# Altium PCB panel-8-touch-pad.PcbDoc
Units mm, origin at the board's own origin, x right, y up, seen from the top; angles counter-clockwise.
Board outline 100 x 50 mm, 2 copper layers (Top Layer, Bottom Layer); 84 components, 42 nets, 231 pads, 72 vias.
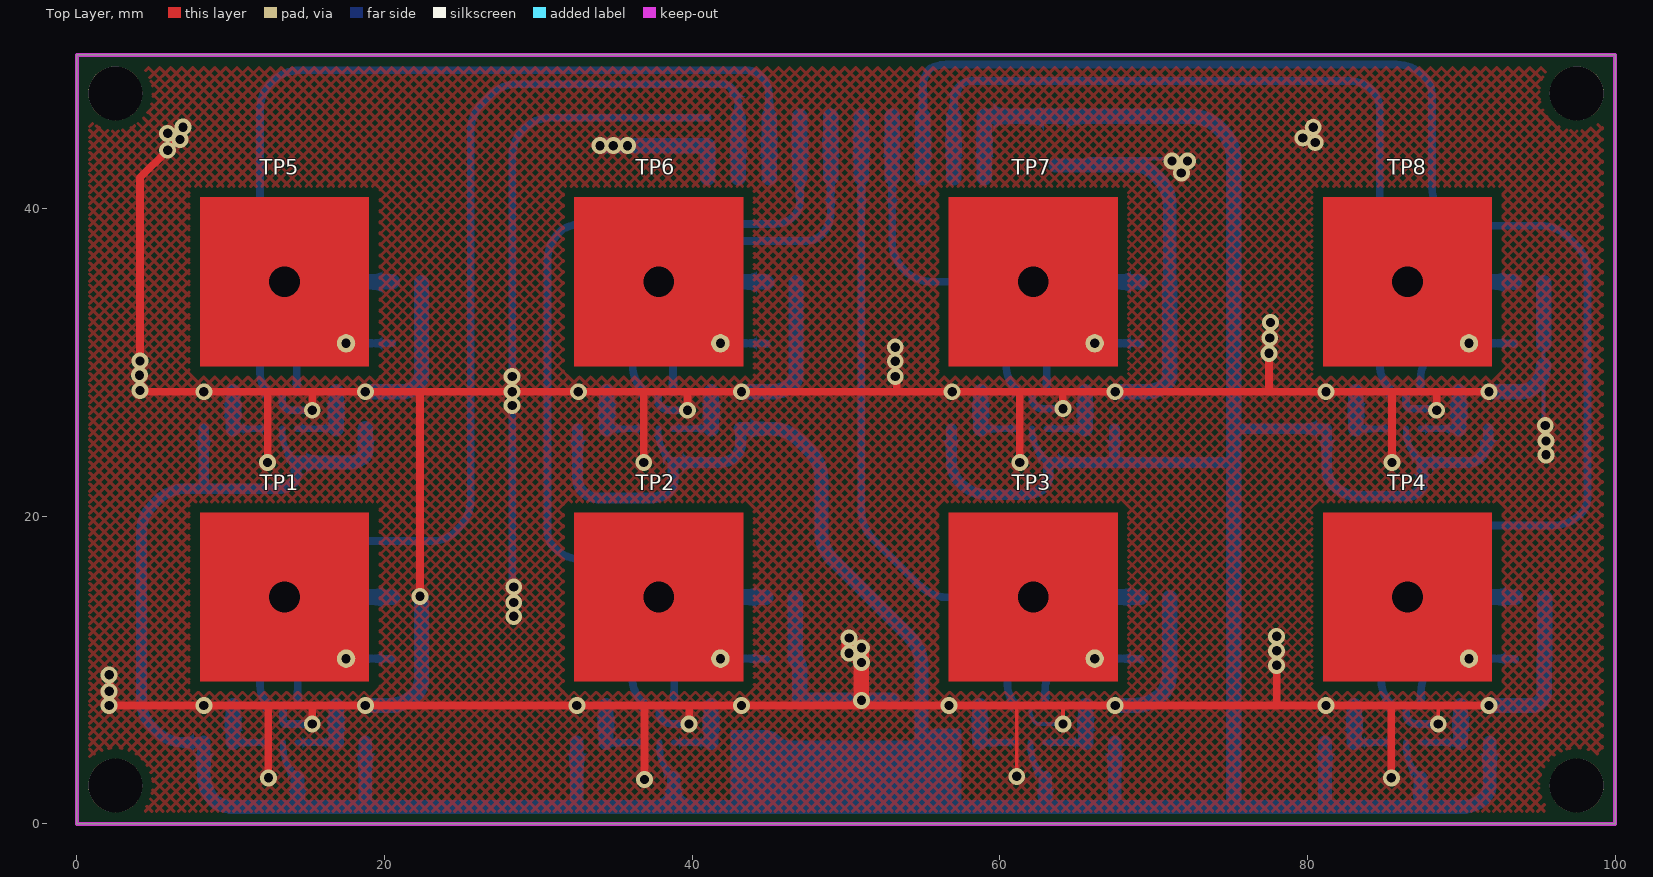
[diagram p0: Top Layer view]
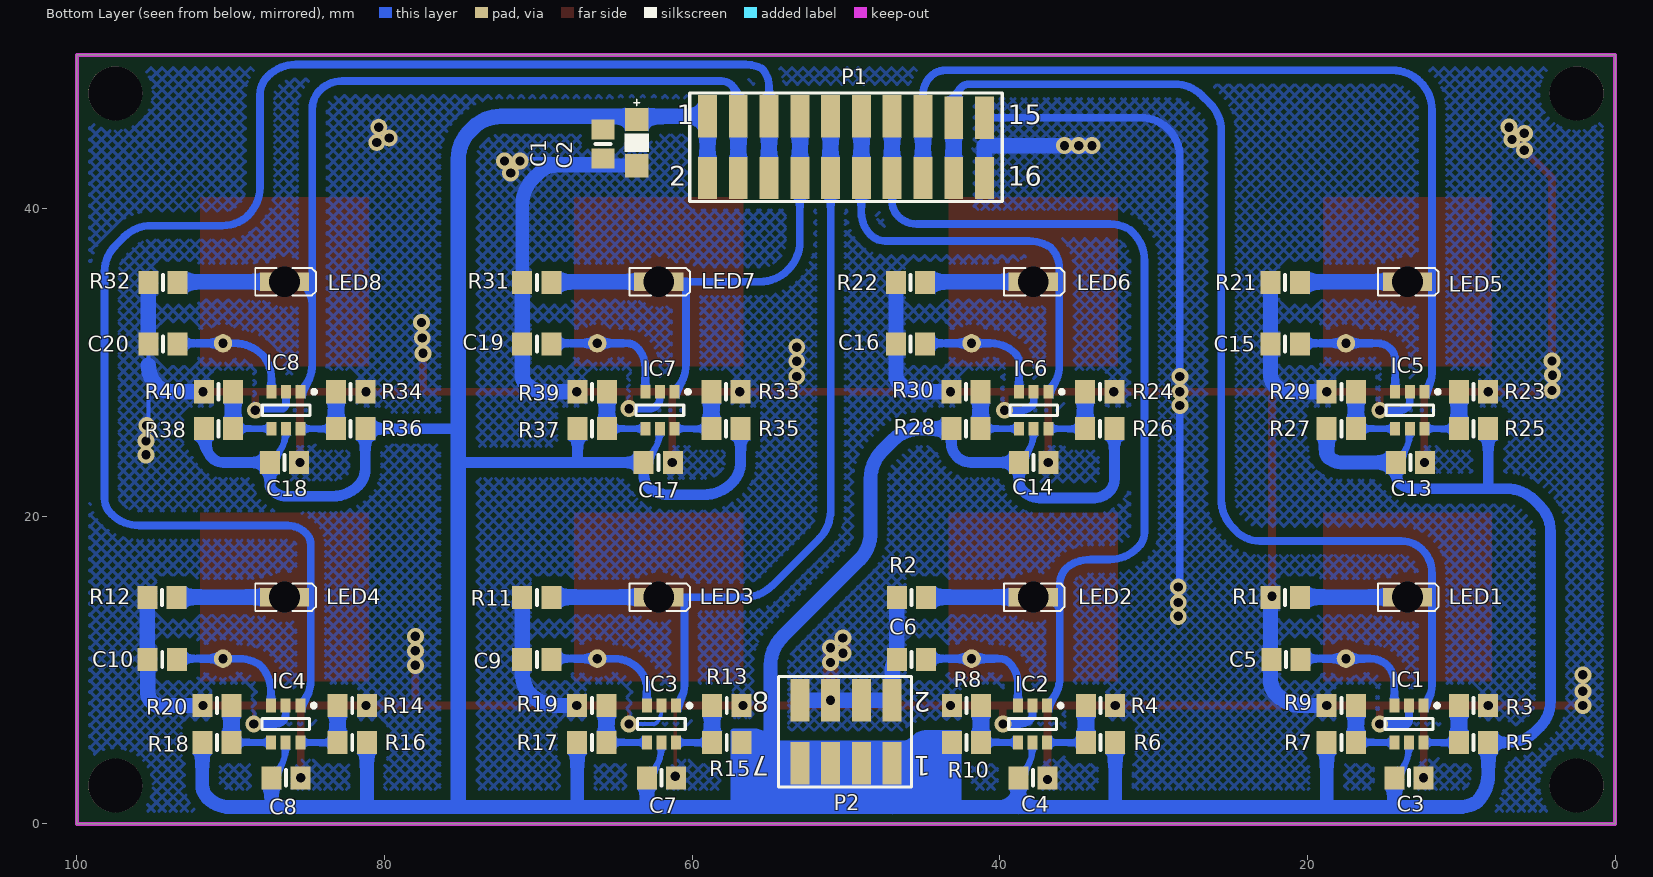
[diagram p1: Bottom Layer view, seen from below]
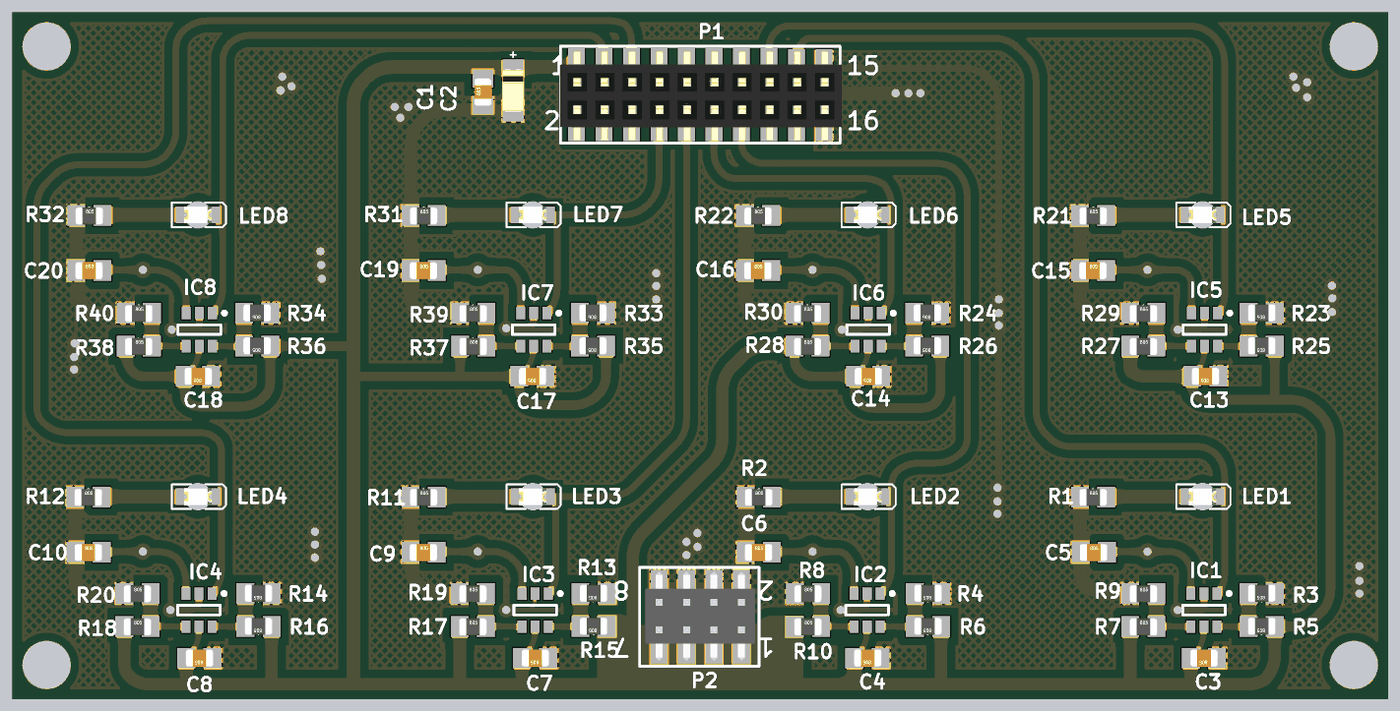
[diagram p2: 3D render of the assembled board from below, using the file's embedded part models]

## Layer stack, top to bottom
Top Solder: solder mask 0.0102, Solder Resist, Dk 3.5
Top Layer: signal copper 0.0356
Dielectric 1: dielectric 0.32, FR-4, Dk 4.8
Bottom Layer: signal copper 0.0356
Bottom Solder: solder mask 0.0102, Solder Resist, Dk 3.5

## Board outline
0,0 100,0 100,50 0,50 0,0

## Design rules (kind name [scope] priority, off if disabled: settings)
Clearance Clearance_1 [InPolygon] p1: gap=0.6
Clearance [All] p2: gap=0.254
PolygonConnect [All] p1: connectstyle=Direct reliefconductorwidth=0.254 reliefentries=4 polygonreliefangle="90 Angle" airgapwidth=0.254
RoomDefinition panel-8-touch-pad [InComponentClass('panel-8-touch-pad')] p1: confinementstyle=ConfineIn formatcopy=TRUE lockcomponents=FALSE outline 141,0 664,0 664,30 141,30
RoutingVias [All] p1: holewidth=0.6 width=1.1 viastyle="Through Hole" minholewidth=0.6 minwidth=1.1 maxholewidth=0.6 maxwidth=1.1
SolderMaskExpansion [All] p1: expansion=0.102
Width [All] p1: maxlimit=1 minlimit=0.254 preferedwidth=0.8
30 further rules are at their usual default settings.

## Components (designator, comment, footprint, x,y, rotation, side; value= is the part's Value field where it differs from the comment)
C1 "100n" C0805 65.8,44.2 r90 bottom
C2 "10uF" C1206 63.6,45.7 r270 bottom
C3 "100n" C0805 13.4,3 r0 bottom
C4 "100n" C0805 37.85,3 r0 bottom
C5 "22pF/50V" C0805 21.4,10.7 r180 bottom
C6 "22pF/50V" C0805 45.75,10.7 r180 bottom
C7 "100n" C0805 62,3 r0 bottom
C8 "100n" C0805 86.4,3 r0 bottom
C9 "22pF/50V" C0805 70.1,10.7 r180 bottom
C10 "22pF/50V" C0805 94.45,10.7 r180 bottom
C13 "100n" C0805 13.3,23.5 r0 bottom
C14 "100n" C0805 37.8,23.5 r0 bottom
C15 "22pF/50V" C0805 21.45,31.2 r180 bottom
C16 "22pF/50V" C0805 45.8,31.2 r180 bottom
C17 "100n" C0805 62.2,23.5 r0 bottom
C18 "100n" C0805 86.5,23.5 r0 bottom
C19 "22pF/50V" C0805 70.1,31.2 r180 bottom
C20 "22pF/50V" C0805 94.4,31.2 r180 bottom
IC1 "TTP223" SOT23-6_L 13.4,6.5 r270 bottom
IC2 "TTP223" SOT23-6_L 37.875,6.5 r270 bottom
IC3 "TTP223" SOT23-6_L 62,6.5 r270 bottom
IC4 "TTP223" SOT23-6_L 86.425,6.5 r270 bottom
IC5 "TTP223" SOT23-6_L 13.35,26.9 r270 bottom
IC6 "TTP223" SOT23-6_L 37.8,26.9 r270 bottom
IC7 "TTP223" SOT23-6_L 62.1,26.9 r270 bottom
IC8 "TTP223" SOT23-6_L 86.4,26.9 r270 bottom
LED1 "Footprint" LED_0805_Blue 13.5,14.75 r180 bottom
LED2 "Footprint" LED_0805_Blue 37.833,14.75 r180 bottom
LED3 "Footprint" LED_0805_Blue 62.167,14.75 r180 bottom
LED4 "Footprint" LED_0805_Blue 86.5,14.75 r180 bottom
LED5 "Footprint" LED_0805_Blue 13.5,35.25 r180 bottom
LED6 "Footprint" LED_0805_Blue 37.833,35.25 r180 bottom
LED7 "Footprint" LED_0805_Blue 62.167,35.25 r180 bottom
LED8 "Footprint" LED_0805_Blue 86.5,35.25 r180 bottom
P1 "Header 10X2" "HDR2X10 - SMD - 2mm" 50,44 r180 bottom
P2 "Header 4X2" "HDR2X4 - SMD - 2mm" 50,6 r0 bottom locked
R1 "220" R0805 21.45,14.725 r180 bottom
R2 "220" R0805 45.75,14.725 r180 bottom
R3 "0R" R0805 9.2,7.7 r0 bottom
R4 "0R" R0805 33.45,7.7 r0 bottom
R5 "0R" R0805 9.2,5.3 r0 bottom
R6 "0R" R0805 33.45,5.3 r0 bottom
R7 "0R" R0805 17.8,5.3 r180 bottom
R8 "0R" R0805 42.175,5.3 r180 bottom
R9 "0R" R0805 17.8,7.7 r180 bottom
R10 "0R" R0805 42.175,7.7 r180 bottom
R11 "220" R0805 70.1,14.725 r180 bottom
R12 "220" R0805 94.475,14.725 r180 bottom
R13 "0R" R0805 57.75,7.7 r0 bottom
R14 "0R" R0805 82.1,7.7 r0 bottom
R15 "0R" R0805 57.75,5.3 r0 bottom
R16 "0R" R0805 82.1,5.3 r0 bottom
R17 "0R" R0805 66.525,5.3 r180 bottom
R18 "0R" R0805 90.9,5.3 r180 bottom
R19 "0R" R0805 66.525,7.7 r180 bottom
R20 "0R" R0805 90.9,7.7 r180 bottom
R21 "220" R0805 21.45,35.2 r180 bottom
R22 "220" R0805 45.8,35.2 r180 bottom
R23 "0R" R0805 9.2,28.1 r0 bottom
R24 "0R" R0805 33.5,28.1 r0 bottom
R25 "0R" R0805 9.2,25.7 r0 bottom
R26 "0R" R0805 33.5,25.7 r0 bottom
R27 "0R" R0805 17.8,25.7 r180 bottom
R28 "0R" R0805 42.2,25.7 r180 bottom
R29 "0R" R0805 17.8,28.1 r180 bottom
R30 "0R" R0805 42.2,28.1 r180 bottom
R31 "220" R0805 70.1,35.2 r180 bottom
R32 "220" R0805 94.4,35.2 r180 bottom
R33 "0R" R0805 57.8,28.1 r0 bottom
R34 "0R" R0805 82.2,28.1 r0 bottom
R35 "0R" R0805 57.8,25.7 r0 bottom
R36 "0R" R0805 82.2,25.7 r0 bottom
R37 "0R" R0805 66.5,25.7 r180 bottom
R38 "0R" R0805 90.8,25.7 r180 bottom
R39 "0R" R0805 66.5,28.1 r180 bottom
R40 "0R" R0805 90.8,28.1 r180 bottom
TP1 "TP" Touch-Pad-Rec 13.5,14.75 r270 top
TP2 "TP" Touch-Pad-Rec 37.833,14.75 r270 top
TP3 "TP" Touch-Pad-Rec 62.167,14.75 r270 top
TP4 "TP" Touch-Pad-Rec 86.5,14.75 r270 top
TP5 "TP" Touch-Pad-Rec 13.5,35.25 r270 top
TP6 "TP" Touch-Pad-Rec 37.833,35.25 r270 top
TP7 "TP" Touch-Pad-Rec 62.167,35.25 r270 top
TP8 "TP" Touch-Pad-Rec 86.5,35.25 r270 top

## Footprints (in the part's own frame and the unit in brackets; to place one, negate y for a bottom-side part, rotate by r counter-clockwise, add the part's x,y. Pads: shape width x height; smd on the part's side, far side on the other; paste and mask are expansions set on the pad)
C0805 [mm] "Chip Capacitor; Body 2.0 x 1.2 mm (LxW typ)"
  rect 1.3x1.5 smd: 1(0.95,0) 2(-0.95,0)
  silkscreen extent 0,-0.5 0,0.5, body extent -1.02,-0.64 0.98,0.61, height 0.78
C1206 [mil]
  rect 60x60 smd: 1(-3.93,0) 2(114.18,0)
  silkscreen extent -55,-31 79,31, body extent -8,-31 118,31, height 63
"HDR2X4 - SMD - 2mm" [mm] "Connector; Header; 8x2 Position"
  rect 1.224x2.754 smd: 1(-3,2.04) 2(-3,-2.04) 3(-1,2.04) 4(-1,-2.04) 5(1,2.04) 6(1,-2.04) 7(3,2.04) 8(3,-2.04)
  silkscreen extent -4.27,-3.6 4.4,3.6, body extent -4,-3.3 4,3.2, height 7
"HDR2X10 - SMD - 2mm" [mm] "Connector; Header; 8x2 Position"
  rect 1.224x2.754 smd: 1(-9,2) 2(-9,-2) 3(-7,2) 4(-7,-2) 5(-5,2) 6(-5,-2) 7(-3,2) 8(-3,-2) 9(-1,2) 10(-1,-2) 11(1,2) 12(1,-2) 13(3,2) 14(3,-2) 15(5,2) 16(5,-2) 17(7,1.92) 18(7,-2) 19(9,1.92) 20(9,-2)
  silkscreen extent -10.16,-3.52 10.16,3.52, body extent -10.2,-3.35 10.3,3.15, height 5.2
LED_0805_Blue [mm] "Chip LED, 2-Leads, Body 2.0x1.3mm, IPC Medium Density"
  rect 1.1x1.2 smd: 1(-1.05,0) 2(1.05,0)
  silkscreen extent -1.91,-0.89 2.03,0.89, body extent -1,-0.63 1,0.62, height 0.68
R0805 [mm]
  rect 1.3x1.5 smd: 1(0.95,0) 2(-0.95,0)
  silkscreen extent 0,-0.5 0,0.5, body extent -1,-0.65 1,0.6, height 0.78
SOT23-6_L [mm] "SOT23, 6-Leads, Body 2.9x1.6mm, Pitch 0.95mm, Lead Span 2.7mm, IPC High Density"
  rect 0.9x0.65 smd: 1(-1.2,0.95) 2(-1.2,0) 3(-1.2,-0.95) 4(1.2,-0.95) 5(1.2,0) 6(1.2,0.95)
  silkscreen extent -1.32,-1.55 0.35,1.95, body extent -0.9,-1.55 0.9,1.55, height 1.45
Touch-Pad-Rec [mm] "Touch-Pad-Rec"
  round 1.2 hole 0.6: 1(4,4)
  round 0 hole 2 unplated: HOLE(0,0)
  Top Layer region: -5.5,-5.5 5.5,-5.5 5.5,5.5 -5.5,5.5
  Top Layer pour cut-out: -6,6 6,6 6,-6 -6,-6

## Part data
C1 C2 C3 C4 C5 C6 C7 C8 C9 C10 C13 C14 C15 C16 C17 C18 C19 C20: library part "Cap Semi", "Capacitor 100n 16V 0603"
IC1 IC2 IC3 IC4 IC5 IC6 IC7 IC8: "TTP223 Touch"
LED1 LED2 LED3 LED4 LED5 LED6 LED7 LED8: library part Led, "LED"
P1: "Header, 10-Pin, Dual row"
P2: "Header, 4-Pin, Dual row"
R1 R2 R11 R12 R21 R22 R31 R32: library part RM, "Resistor SMD"
R3 R4 R5 R6 R7 R8 R9 R10 R13 R14 R15 R16 R17 R18 R19 R20 R23 R24 R25 R26 R27 R28 R29 R30 R33 R34 R35 R36 R37 R38 R39 R40: library part Res3, "Resistor 10k 0603"
TP1 TP2 TP3 TP4 TP5 TP6 TP7 TP8: library part Touch-Pad, "Touch Pad"

## Free pads (board coordinates)
  round 3.5 hole 3.5: 0(2.5,2.5) 0(2.5,47.5) 0(97.5,2.5) 0(97.5,47.5)
  round 1.1 hole 0.6: 2(80.371,45.3) 3(80.5,44.3) 4(79.7,44.6)

## Via types
v1: diameter 1.1, hole 0.6, Top Layer to Bottom Layer, tented both sides, 72 vias

## Nets (pads, with @x,y where several pads share a name; then routed paths per layer and width w, separated by ;. In a path a pad name is that pad's centre, name@x,y a point inside that pad or via, vN(x,y) a via of type N, cw(c..) or ccw(c..) an arc to the next point about the centre after c; other vN are vias at no path point)
3V3: C1.1 C2.1 C3.1 C4.1 C7.1 C8.1 C13.1 C14.1 C17.1 C18.1 IC1.5 IC2.5 IC3.5 IC4.5 IC5.5 IC6.5 IC7.5 IC8.5 P1.1 P1.2 P2.1 P2.3 P2.5 P2.7 R5.2 R6.2 R7.2 R8.2 R15.2 R16.2 R17.2 R18.2 R25.2 R26.2 R27.2 R28.2 R35.2 R36.2 R37.2 R38.2 | length 352.4
  Bottom Layer w0.4: IC5.5 13.35,25.452 ccw(c15.89,25.452) 14.094,23.656 C13.1 ; IC1.5 13.4,5.002 ccw(c15.94,5.002) 14.144,3.206 C3.1 ; IC6.5 37.8,25.502 ccw(c40.34,25.502) 38.544,23.706 C14.1 ; IC2.5 37.875,4.977 ccw(c40.415,4.977) 38.619,3.181 C4.1 ; IC3.5 62,5.002 ccw(c64.54,5.002) 62.744,3.206 C7.1 ; IC7.5 62.1,25.602 ccw(c64.64,25.602) 62.844,23.806 C17.1 ; IC8.5 86.4,25.602 ccw(c88.94,25.602) 87.144,23.806 C18.1 ; IC4.5 86.425,4.977 ccw(c88.965,4.977) 87.169,3.181 C8.1
  Bottom Layer w0.7: R5.2 6.952,5.3 cw(c6.952,7.84) 5.156,6.044 4.9,6.3 cw(c6.59,7.99) 4.2,7.99 4.2,19.01 cw(c6.59,19.01) 4.9,20.7 5.256,21.056 cw(c7.052,19.26) 7.052,21.8 8.2,21.8 ; R25.2 8.25,21.921 cw(c8.079,21.921) 8.2,21.8 ; C13.1 14.25,22.803 cw(c13.011,22.803) 14.115,22.241 cw(c13.05,23.307) 13.05,21.8 8.2,21.8 ; R26.2 32.55,22.445 ccw(c33.745,22.445) 32.9,21.6 ccw(c33.866,22.566) 33.866,21.2 37.415,21.2 ccw(c37.415,22.723) 38.491,21.646 ccw(c37.867,22.271) 38.75,22.271 C14.1 41.87,23.5 ccw(c41.87,24.788) 42.781,23.877 ccw(c41.889,24.769) 43.15,24.769 R28.2 ; R35.2 56.85,23.528 ccw(c58.728,23.528) 57.4,22.2 57.456,22.144 ccw(c59.252,23.94) 59.252,21.4 61.484,21.4 ccw(c61.484,23.685) 62.771,21.796 ccw(c61.854,22.713) 63.15,22.713 C17.1 67.5,23.5 ; R37.2 67.45,23.621 ccw(c67.621,23.621) 67.5,23.5 ; 75.2,23.4 ccw(c74.959,23.159) 74.959,23.5 67.5,23.5 ; 75.2,25.8 ccw(c75.441,26.041) 75.441,25.7 R36.2 81.25,23.086 ccw(c82.786,23.086) 81.7,22 ccw(c83.39,23.69) 83.39,21.3 86.334,21.3 ccw(c86.334,22.666) 87.3,21.7 ccw(c86.938,22.062) 87.45,22.062 C18.1 90.476,23.5 ccw(c90.476,24.524) 91.2,23.8 ccw(c89.872,25.128) 91.75,25.128 R38.2
  Bottom Layer w0.9: R5.2 8.25,3.223 ccw(c10.79,3.223) 8.994,1.427 9.007,1.413 ccw(c10.19,3.49) 10.19,1.1 14.4,1.1 ; C13.1 17.804,23.5 ccw(c17.804,24.626) 18.6,23.83 ; C3.1 14.35,1.221 ccw(c14.521,1.221) 14.4,1.1 ; R7.2 18.75,1.221 ccw(c18.921,1.221) 18.8,1.1 ; R6.2 32.5,1.341 cw(c32.159,1.341) 32.4,1.1 ; C4.1 38.8,1.1 ; R8.2 43.125,1.281 ccw(c43.381,1.281) 43.2,1.1 ; R28.2 45.148,25.7 cw(c45.148,23.16) 46.944,24.956 47.656,24.244 cw(c45.86,22.448) 48.4,22.448 48.4,18.952 ccw(c50.94,18.952) 49.144,17.156 54.156,12.144 cw(c52.36,10.348) 54.9,10.348 54.9,5.266 cw(c53.534,5.266) 54.5,4.3 cw(c53.679,5.121) 53.679,3.96 P2.7 ; P2.1 47,1.1 ; R15.2 56.8,1.341 ccw(c57.141,1.341) 56.9,1.1 ; C7.1 62.95,1.221 ccw(c63.121,1.221) 63,1.1 ; R17.2 67.475,1.281 cw(c67.219,1.281) 67.4,1.1 ; 75.2,1.341 ccw(c75.541,1.341) 75.3,1.1 ; R16.2 81.15,1.221 ccw(c81.321,1.221) 81.2,1.1 ; C8.1 87.35,1.221 cw(c87.179,1.221) 87.3,1.1 ; R18.2 91.85,2.545 cw(c90.655,2.545) 91.5,1.7 cw(c90.051,3.149) 90.051,1.1 87.3,1.1 ; 14.4,1.1 18.8,1.1 ; 18.8,1.1 32.4,1.1 ; 32.4,1.1 38.8,1.1 ; 38.8,1.1 43.2,1.1 ; 43.2,1.1 47,1.1 ; 47,1.1 56.9,1.1 ; 56.9,1.1 63,1.1 ; 63,1.1 67.4,1.1 ; 67.4,1.1 75.3,1.1 ; 75.3,1.1 81.2,1.1 ; 81.2,1.1 87.3,1.1
  Bottom Layer w1: 18.6,23.83 ccw(c18.238,24.192) 18.75,24.192 R27.2 ; P2.1 P2.3 P2.5 P2.7 ; P1.2 P1.1 72.448,46 cw(c72.448,43.46) 74.244,45.256 74.456,45.044 cw(c72.66,43.248) 75.2,43.248 75.2,25.8 75.2,23.4 75.2,1.341
GND: C1.2 C2.2 C3.2 C4.2 C5.2 C6.2 C7.2 C8.2 C9.2 C10.2 C13.2 C14.2 C15.2 C16.2 C17.2 C18.2 C19.2 C20.2 IC1.2 IC2.2 IC3.2 IC4.2 IC5.2 IC6.2 IC7.2 IC8.2 P1.19 P1.20 P2.2 P2.4 P2.6 P2.8 pad.2 pad.3 pad.4 R1.2 R2.2 R3.2 R4.2 R9.2 R10.2 R11.2 R12.2 R13.2 R14.2 R19.2 R20.2 R21.2 R22.2 R23.2 R24.2 R29.2 R30.2 R31.2 R32.2 R33.2 R34.2 R39.2 R40.2 | length 462.5
  Top Layer w0.254: v1(61.1,3.1) 61.1,7.7 ; 64,7.7 cw(c63.759,7.459) 64.1,7.459 v1(64.1,6.5) ; v1(88.5,6.5) 88.5,7.7
  Top Layer w0.5: v1(2.1,9.7) v1(2.1,8.624) v1(2.1,7.7) v1(8.25,7.7) 12.4,7.7 ; v1(5.9,44.9) 6.5,44.9 v1@6.7,45.1 ; v1(6.9,45.3) v1@6.7,45.1 ; v1(12.4,23.5) 12.4,28.1 ; v1(12.45,3) 12.45,7.579 ccw(c12.279,7.579) 12.4,7.7 ; v1(15.3,6.5) 15.3,7.459 ccw(c14.959,7.459) 15.2,7.7 ; v1(15.3,26.9) 15.3,28.1 ; v1(22.3,14.8) 22.3,27.859 ccw(c21.959,27.859) 22.2,28.1 ; v1(36.85,23.5) 36.85,27.979 ccw(c36.679,27.979) 36.8,28.1 ; v1(36.9,2.9) 36.9,7.7 ; v1(39.7,26.9) 39.7,27.859 cw(c40.041,27.859) 39.8,28.1 ; v1(39.8,6.5) 39.8,7.7 ; v1(53.2,31) v1(53.2,30.084) v1(53.2,29.1) 53.3,29 53.3,28.1 ; v1(61.3,23.5) 61.3,27.859 cw(c61.641,27.859) 61.4,28.1 ; v1(64.1,27) 64.1,28.1 ; v1(77.6,32.6) 77.547,32.547 v1(77.547,31.6) 77.5,31.553 v1(77.5,30.6) 77.5,28.1 ; v1(78,12.2) 78,11.358 78.1,11.258 78,11.158 v1(78,10.313) 78,7.7 ; v1(85.45,3) 85.45,7.579 ccw(c85.279,7.579) 85.4,7.7 ; v1(85.5,23.5) 85.5,27.859 ccw(c85.159,27.859) 85.4,28.1 ; v1(88.4,26.9) 88.4,28.1 ; v1(91.8,7.7) 88.5,7.7 85.4,7.7 ; v1(91.8,28.1) 88.4,28.1 ; v1@6.7,45.1 v1(6.7,44.5) 6.6,44.5 v1(5.9,43.8) 4.1,42 v1(4.1,30.1) 4.064,30.064 v1(4.064,29.179) 4.1,29.143 v1(4.1,28.176) 4.1,28 4.2,28.1 v1(8.25,28.1) 12.4,28.1 ; 12.4,7.7 15.2,7.7 ; 12.4,28.1 15.3,28.1 ; 15.2,7.7 v1(18.75,7.7) v1(32.5,7.7) 36.9,7.7 ; 15.3,28.1 v1(18.75,28.1) 22.2,28.1 ; 22.2,28.1 v1(28.3,28.1) v1(32.6,28.1) 36.8,28.1 ; 36.8,28.1 39.8,28.1 ; 36.9,7.7 39.8,7.7 ; 39.8,7.7 v1(43.2,7.7) v1(56.7,7.7) 61.1,7.7 64,7.7 v1(67.5,7.7) 78,7.7 ; 39.8,28.1 v1(43.2,28.1) 53.3,28.1 ; 53.3,28.1 v1(56.9,28.1) 61.4,28.1 ; 61.4,28.1 64.1,28.1 ; 64.1,28.1 v1(67.5,28.1) 77.5,28.1 ; 77.5,28.1 v1(81.2,28.1) 85.4,28.1 ; 78,7.7 v1(81.2,7.7) 85.4,7.7 ; 85.4,28.1 88.4,28.1
  Top Layer w1: v1(50.205,12.1) 50.2,12.095 v1(50.2,11.1) 50.558,11.458 v1(51,11.458) v1(51,10.5) v1(51,8.04)
  Bottom Layer w0.254: IC3.2 62,7.324 ccw(c63.024,7.324) 62.3,6.6 ccw(c62.541,6.841) 62.541,6.5 v1(64.1,6.5) ; C1.2 71.05,43.25 v1(71.2,43.1) v1(72.2,43.1) 72.2,42.716 v1(71.8,42.316) ; v1@88.3,6.5 v1(88.5,6.5) ; C20.2 95.35,29.828 95.35,26.01 v1(95.46,25.9) 95.46,24.94 v1(95.5,24.9) v1(95.5,24)
  Bottom Layer w0.5: IC5.2 13.35,27.462 ccw(c13.862,27.462) 13.5,27.1 ccw(c13.983,27.583) 13.983,26.9 v1(15.3,26.9) ; IC1.2 13.4,6.741 ccw(c13.741,6.741) 13.5,6.5 v1(15.3,6.5) ; v1(28.3,28.1) v1(28.3,27.2) 28.3,15.641 ccw(c28.641,15.641) v1(28.4,15.4) v1(28.4,14.4) v1(28.4,13.5) ; v1(28.3,29.1) 28.3,43.38 cw(c30.84,43.38) 28.418,44.146 cw(c30.84,43.38) 30.84,45.92 P1.19 ; IC6.2 37.8,27.441 ccw(c38.141,27.441) 37.9,27.2 ccw(c38.624,27.924) 38.624,26.9 39.459,26.9 ccw(c39.459,27.241) 39.7,27 v1(39.7,26.9) ; IC2.2 37.875,7.102 ccw(c38.302,7.102) 38,6.8 ccw(c38.724,7.524) 38.724,6.5 v1(39.8,6.5) ; IC7.2 62.1,27.683 ccw(c62.783,27.683) 62.3,27.2 ccw(c62.783,27.683) 62.783,27 v1(64.1,27) ; IC8.2 86.4,27.341 ccw(c86.741,27.341) 86.5,27.1 ccw(c86.741,27.341) 86.741,27 88.4,27 v1(88.4,26.9) ; IC4.2 86.425,7.122 ccw(c87.022,7.122) 86.6,6.7 ccw(c87.083,7.183) 87.083,6.5 v1@88.3,6.5
  Bottom Layer w0.9: C2.2 68.793,42.8 cw(c68.793,41.093) 70,42.3 70.306,41.994 cw(c68.51,40.198) 71.05,40.198 R31.2
  Bottom Layer w1: v1(18.75,7.7) 20.31,7.7 ccw(c20.31,10.09) 22,8.4 ccw(c21.034,9.366) 22.4,9.366 R1.2 cw(c22.4,14.785) 22.357,14.743 v1(22.3,14.8) ; v1(18.75,28.1) 21.134,28.1 ccw(c21.134,29.466) 22.1,28.5 ccw(c21.376,29.224) 22.4,29.224 C15.2 R21.2 ; v1(34,44.1) v1(34.874,44.1) v1(35.8,44.1) 41,44.1 P1.20 ; v1(43.2,28.1) 45.201,28.1 ccw(c45.201,30.039) 46.572,28.668 ccw(c46.141,29.099) 46.75,29.099 C16.2 R22.2 ; R2.2 C6.2 cw(c45.976,9.976) 47,9.976 P2.2 P2.4 v1(51,8.04) P2.8 ; v1(67.5,7.7) 68.737,7.7 ccw(c68.737,10.24) 70.533,8.444 70.693,8.604 ccw(c68.51,9.902) 71.05,9.902 C9.2 R11.2 ; v1(67.5,28.1) 69.593,28.1 ccw(c69.593,29.807) 70.8,28.6 ccw(c70.196,29.204) 71.05,29.204 C19.2 R31.2 ; v1(91.8,28.1) 93.834,28.1 ccw(c93.834,29.466) 94.8,28.5 ccw(c93.472,29.828) 95.35,29.828 ; R20.2 94.617,7.7 ccw(c94.617,8.383) 95.1,7.9 ccw(c94.376,8.624) 95.4,8.624 C10.2 ; C20.2 R32.2 ; C10.2@95.425,10.7 R12.2
  other v1: 78,11.258
NetC5_1: C5.1 IC1.3 TP1.1 | length 8.5
  Bottom Layer w0.5: IC1.3 14.35,9.214 cw(c15.886,9.214) 14.8,10.3 cw(c15.886,9.214) 15.886,10.75 TP1.1 20.329,10.75 cw(c20.329,10.579) C5.1
NetC6_1: C6.1 IC2.3 TP2.1 | length 8.4
  Bottom Layer w0.5: IC2.3 38.825,9.112 cw(c40.788,9.112) 39.4,10.5 cw(c40.004,9.896) 40.004,10.75 TP2.1 44.679,10.75 cw(c44.679,10.579) C6.1
NetC9_1: C9.1 IC3.3 TP3.1 | length 8.4
  Bottom Layer w0.5: IC3.3 62.95,8.772 cw(c64.828,8.772) 63.5,10.1 cw(c65.069,8.531) 65.069,10.75 TP3.1 69.029,10.75 cw(c69.029,10.579) C9.1
NetC10_1: C10.1 IC4.3 TP4.1 | length 8.3
  Bottom Layer w0.5: IC4.3 87.375,8.562 cw(c89.915,8.562) 88.119,10.358 88.124,10.362 cw(c89.472,8.21) 89.472,10.75 TP4.1 93.379,10.75 cw(c93.379,10.579) C10.1
NetC15_1: C15.1 IC5.3 TP5.1 | length 8.9
  Bottom Layer w0.5: IC5.3 14.3,30.176 cw(c15.324,30.176) 14.6,30.9 cw(c15.445,30.055) 15.445,31.25 TP5.1 C15.1@20.5,31.25
NetC16_1: C16.1 IC6.3 TP6.1 | length 8.6
  Bottom Layer w0.5: IC6.3 38.75,29.996 cw(c39.604,29.996) 39,30.6 cw(c40.569,29.031) 40.569,31.25 TP6.1 44.729,31.25 cw(c44.729,31.079) C16.1
NetC19_1: C19.1 IC7.3 TP7.1 | length 8.7
  Bottom Layer w0.5: IC7.3 63.05,29.672 cw(c64.928,29.672) 63.6,31 cw(c64.204,30.396) 64.204,31.25 TP7.1 69.029,31.25 cw(c69.029,31.079) C19.1
NetC20_1: C20.1 IC8.3 TP8.1 | length 8.3
  Bottom Layer w0.5: IC8.3 87.35,28.898 cw(c89.89,28.898) 87.827,30.38 87.953,30.506 cw(c89.749,28.71) 89.749,31.25 TP8.1 93.329,31.25 cw(c93.329,31.079) C20.1
NetIC1_4: IC1.4 R7.1 R9.1 | length 4.9
  Bottom Layer w0.4: IC1.4 R7.1
  Bottom Layer w1: R7.1 R9.1
NetIC1_6: IC1.6 R3.1 R5.1 | length 4.7
  Bottom Layer w0.4: R5.1 IC1.6
  Bottom Layer w1: R5.1 R3.1
NetIC2_4: IC2.4 R8.1 R10.1 | length 4.8
  Bottom Layer w0.4: IC2.4 R8.1
  Bottom Layer w1: R8.1 R10.1
NetIC2_6: IC2.6 R4.1 R6.1 | length 4.9
  Bottom Layer w0.4: R6.1 IC2.6
  Bottom Layer w1: R6.1 R4.1
NetIC3_4: IC3.4 R17.1 R19.1 | length 5
  Bottom Layer w0.4: IC3.4 R17.1
  Bottom Layer w1: R17.1 R19.1
NetIC3_6: IC3.6 R13.1 R15.1 | length 4.7
  Bottom Layer w0.4: R15.1 IC3.6
  Bottom Layer w1: R15.1 R13.1
NetIC4_4: IC4.4 R18.1 R20.1 | length 5
  Bottom Layer w0.4: IC4.4 R18.1
  Bottom Layer w1: R18.1 R20.1
NetIC4_6: IC4.6 R14.1 R16.1 | length 4.8
  Bottom Layer w0.4: R16.1 IC4.6
  Bottom Layer w1: R16.1 R14.1
NetIC5_4: IC5.4 R27.1 R29.1 | length 4.9
  Bottom Layer w0.4: IC5.4 R27.1
  Bottom Layer w1: R27.1 R29.1
NetIC5_6: IC5.6 R23.1 R25.1 | length 4.6
  Bottom Layer w0.4: R25.1 IC5.6
  Bottom Layer w1: R25.1 R23.1
NetIC6_4: IC6.4 R28.1 R30.1 | length 4.9
  Bottom Layer w0.4: IC6.4 R28.1
  Bottom Layer w1: R28.1 R30.1
NetIC6_6: IC6.6 R24.1 R26.1 | length 4.8
  Bottom Layer w0.4: R26.1 IC6.6
  Bottom Layer w1: R26.1 R24.1
NetIC7_4: IC7.4 R37.1 R39.1 | length 4.9
  Bottom Layer w0.4: IC7.4 R37.1
  Bottom Layer w1: R37.1 R39.1
NetIC7_6: IC7.6 R33.1 R35.1 | length 4.8
  Bottom Layer w0.4: R35.1 IC7.6
  Bottom Layer w1: R35.1 R33.1
NetIC8_4: IC8.4 R38.1 R40.1 | length 4.9
  Bottom Layer w0.4: IC8.4 R38.1
  Bottom Layer w1: R38.1 R40.1
NetIC8_6: IC8.6 R34.1 R36.1 | length 4.7
  Bottom Layer w0.4: R36.1 IC8.6
  Bottom Layer w1: R36.1 R34.1
NetLED1_1: LED1.1 R1.1 | length 6
  Bottom Layer w1: LED1.1 20.44,14.75 cw(c20.44,14.665) R1.1
NetLED2_1: LED2.1 R2.1 | length 5.9
  Bottom Layer w1: LED2.1 44.74,14.75 cw(c44.74,14.665) R2.1
NetLED3_1: LED3.1 R11.1 | length 5.9
  Bottom Layer w1: LED3.1 69.09,14.75 cw(c69.09,14.665) R11.1
NetLED4_1: LED4.1 R12.1 | length 6
  Bottom Layer w1: LED4.1 93.465,14.75 cw(c93.465,14.665) R12.1
NetLED5_1: LED5.1 R21.1 | length 5.9
  Bottom Layer w1: LED5.1 R21.1@20.5,35.25
NetLED6_1: LED6.1 R22.1 | length 6
  Bottom Layer w1: LED6.1 44.729,35.25 cw(c44.729,35.079) R22.1
NetLED7_1: LED7.1 R31.1 | length 5.9
  Bottom Layer w1: LED7.1 69.029,35.25 cw(c69.029,35.079) R31.1
NetLED8_1: LED8.1 R32.1 | length 5.9
  Bottom Layer w1: LED8.1 93.329,35.25 cw(c93.329,35.079) R32.1
OUT1: IC1.1 LED1.2 P1.17 P1.18 | length 73.8
  Bottom Layer w0.5: IC1.1@12.449,7.701 cw(c13.778,9.028) 11.9,9.028 11.9,16.3 cw(c14.073,16.3) 12.536,17.836 cw(c13.897,16.476) 13.897,18.4 23.1,18.4 ccw(c23.1,20.573) 24.458,18.877 24.856,19.275 ccw(c23.06,21.071) 25.6,21.071 25.6,45.048 cw(c28.14,45.048) 26.344,46.844 26.856,47.356 cw(c28.652,45.56) 28.652,48.1 42.017,48.1 cw(c42.017,47.417) 42.5,47.9 cw(c41.293,46.693) 43,46.693 P1.17
  Bottom Layer w1: P1.18 P1.17
OUT2: IC2.1 LED2.2 P1.13 P1.14 | length 58.5
  Bottom Layer w0.5: IC2.1@36.644,7.981 IC2.1@36.844,7.781 ; LED2.2 36.371,14.338 ccw(c37.509,13.2) 36.1,13.977 ; IC2.1 IC2.1@36.844,7.781 ; P1.14 47,40.466 cw(c45.634,40.466) 46.6,39.5 cw(c45.393,40.707) 45.393,39 32.851,39 ccw(c32.851,36.46) 31.539,38.635 31.344,38.44 ccw(c33.14,36.644) 30.6,36.644 30.6,18.966 ccw(c31.966,18.966) 31,18 31.056,17.944 ccw(c32.852,19.74) 32.852,17.2 34.091,17.2 cw(c34.091,14.66) 35.651,16.665 cw(c34.565,15.58) 36.096,15.692 cw(c34.565,15.58) 36.1,15.58 36.1,13.977 ; 36.1,13.977 36.1,9.577 ccw(c38.64,9.577) IC2.1@36.844,7.781
  Bottom Layer w1: P1.14 P1.13
OUT3: IC3.1 LED3.2 P1.9 P1.10 | length 45.4
  Bottom Layer w0.5: P1.10 51,20.352 ccw(c53.54,20.352) 51.744,18.556 54.806,15.494 ccw(c56.602,17.29) 56.197,14.782 ccw(c56.276,14.861) 56.276,14.75 60.5,14.75 60.5,9.028 ccw(c62.378,9.028) IC3.1 IC3.1@60.844,7.906
  Bottom Layer w1: P1.10 P1.9
OUT4: IC4.1 LED4.2 P1.5 P1.6 | length 100.4
  Bottom Layer w0.5: P1.5 55,47.948 cw(c56.664,47.948) 55.488,49.125 cw(c56.515,47.085) 55.958,49.3 cw(c56.515,47.085) 56.515,49.369 85.779,49.369 cw(c85.779,46.829) 87.575,48.625 87.6,48.6 cw(c86.393,47.393) 88.1,47.393 88.1,41.385 ccw(c90.64,41.385) 88.844,39.589 89.014,39.419 ccw(c90.552,41.44) 90.552,38.9 95.148,38.9 cw(c95.148,36.36) 96.944,38.156 97.5,37.6 cw(c95.81,35.91) 98.2,35.91 98.2,21.166 cw(c96.834,21.166) 97.8,20.2 97.744,20.144 cw(c95.948,21.94) 95.948,19.4 86.307,19.4 ccw(c86.307,17.693) 85.1,18.9 ccw(c85.824,18.176) 84.8,18.176 84.8,9.33 ccw(c87.105,9.33) 85.474,7.701 ccw(c87.105,9.33) IC4.1
  Bottom Layer w1: P1.6 P1.5
OUT5: IC5.1 LED5.2 P1.15 P1.16 | length 59.4
  Bottom Layer w0.5: IC5.1 cw(c13.607,29.307) 11.9,29.307 11.9,46.417 cw(c14.44,46.417) 12.666,48.235 12.687,48.256 cw(c14.483,46.46) 14.483,49 43.534,49 cw(c43.534,47.634) 44.5,48.6 cw(c43.293,47.393) 45,47.393 P1.15
  Bottom Layer w1: P1.16 P1.15
OUT6: IC6.1 LED6.2 P1.11 P1.12 | length 29.5
  Bottom Layer w0.5: IC6.1 cw(c38.593,29.843) 36.128,29.843 36.128,36.087 cw(c38.109,36.087) 36.708,37.488 cw(c38.096,35.36) 38.096,37.9 47.434,37.9 ccw(c47.434,39.266) 48.4,38.3 ccw(c46.951,39.749) 49,39.749 P1.12
  Bottom Layer w1: P1.12 P1.11
OUT7: IC7.1 LED7.2 P1.7 P1.8 | length 25
  Bottom Layer w0.5: P1.8 53,37.852 ccw(c55.54,37.852) 53.744,36.056 53.806,35.994 ccw(c55.602,37.79) 55.602,35.25 60.3,35.25 ; LED7.2@60.663,35.25 60.3,35.25 ; LED7.2@60.89,35.023 LED7.2 ; IC7.1 61.144,28.106 cw(c62.94,29.902) 60.4,29.902 60.4,35.009 ccw(c60.059,35.009) 60.3,35.25
  Bottom Layer w1: P1.8 P1.7
OUT8: IC8.1 LED8.2 P1.3 P1.4 | length 54.8
  Bottom Layer w0.5: P1.3 57,47.034 cw(c58.366,47.034) 57.4,48 cw(c58.124,47.276) 58.124,48.3 82.751,48.3 cw(c82.751,46.251) 84.2,47.7 cw(c82.993,46.493) 84.7,46.493 84.7,33.8 ; IC8.1 85.444,28.106 cw(c87.24,29.902) 84.7,29.902 84.7,33.8 ; LED8.2 85.195,34.995 ccw(c86.39,33.8) 84.7,33.8
  Bottom Layer w1: P1.4 P1.3
pads on no net: TP1.HOLE TP2.HOLE TP3.HOLE TP4.HOLE TP5.HOLE TP6.HOLE TP7.HOLE TP8.HOLE

## Polygon pours and split planes (outlines as drawn)
GND on Top Layer "TOP-GND" (hatched 45Degree grid 0.508 track 0.203, pour order 2): 0,0 100,0 100,50 0,50 0,0
GND on Bottom Layer "BOT-GND" (hatched 45Degree grid 0.508 track 0.2, pour order 4): 0,0 100,0 100,50 0,50 0,0

## Keep-outs
Keep-Out Layer:
  the board outline again, w0.254

## Other copper
Bottom Layer:
  region net 3V3: 42.5,6.1 44.734,6.1 cw(c44.734,4.734) 45.7,5.7 ccw(c46.424,6.424) 46.424,5.4 54.076,5.4 ccw(c54.076,6.424) 54.8,5.7 cw(c56.007,4.493) 56.007,6.2 57.259,6.2 cw(c57.259,5.859) 57.5,6.1 57.5,0.7 42.5,0.7

## Text inside footprints (layer, text, board x,y; h text height)
P1: Bottom Overlay "1" at 61,45.5 h1.27; Bottom Overlay "2" at 61.5,41.5 h1.27; Bottom Overlay "16" at 39.5,41.5 h1.27; Bottom Overlay "15" at 39.5,45.5 h1.27
P2: Bottom Overlay "2" at 44.5,8.56 h1.27 r180; Bottom Overlay "1" at 44.5,4.4 h1.27 r180; Bottom Overlay "7" at 55,4.4 h1.27 r180; Bottom Overlay "8" at 55,8.56 h1.27 r180